# EAGLE board slice (EAGLE 5.11)
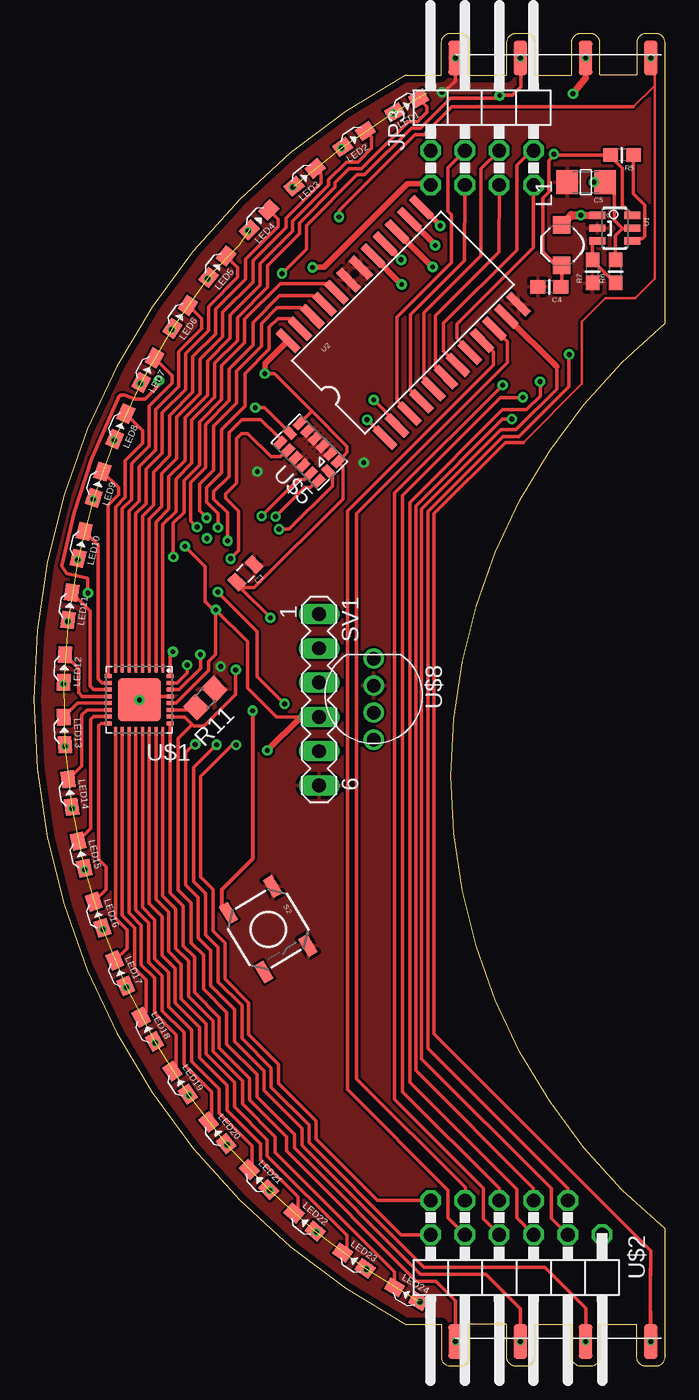
[diagram p0: board, top side]
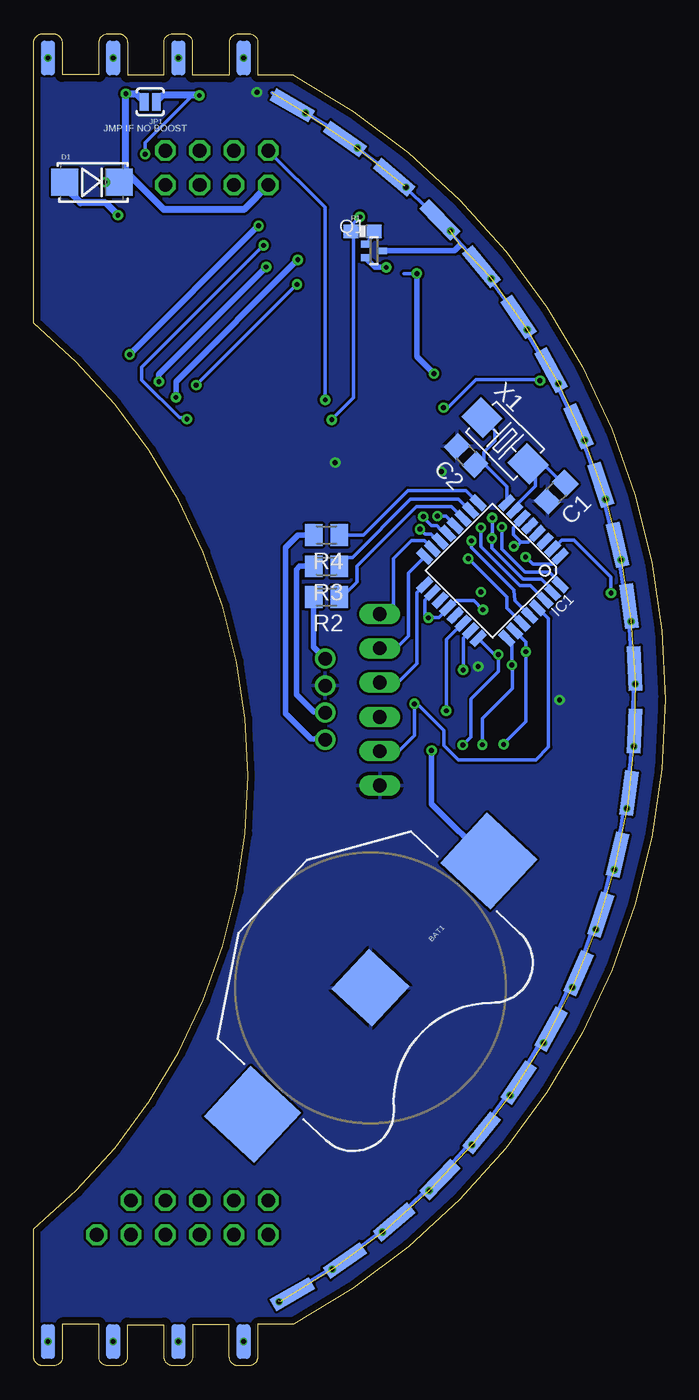
[diagram p1: board, bottom side, seen from below]

Size 46.74 x 98.58 mm. Coordinates in mm from the lower left corner, seen from the top.
Outline: 41.92,3.06 41.92,0.63 arc-90 41.28,0 40.45,0 arc-90 39.82,0.63 39.82,3.05 37.09,3.05 37.09,0.63 arc-90 36.45,0 35.63,0 arc-90 34.99,0.63 34.99,3.06 32.26,3.06 32.26,0.63 arc-90 31.63,0 30.8,0 arc-90 30.17,0.63 30.17,3.06 27.5,3.06 arc-123 27.5,95.52 30.16,95.52 30.16,97.94 arc-90 30.79,98.58 31.62,98.58 arc-90 32.25,97.94 32.25,95.5 35.01,95.5 35.01,97.94 arc-90 35.64,98.58 36.47,98.58 arc-90 37.1,97.94 37.1,95.5 39.81,95.5 39.81,97.94 arc-90 40.44,98.58 41.27,98.58 arc-90 41.9,97.94 41.9,95.53 44.65,95.53 44.65,97.94 arc-90 45.28,98.58 46.11,98.58 arc-90 46.74,97.94 46.74,77.15 arc101 46.74,10.12
Outline: 41.92,3.06 41.92,3.07
Outline: 41.92,3.06 44.62,3.06 44.62,0.63 arc90 45.26,0 46.11,0 arc90 46.74,0.63 46.74,10.12
Copper layers (1*16): Top 0.0356mm / dielectric 1.5011mm / Bottom 0.0356mm
Design rules "SilverCircuits-tented": minimum track width 7mil, minimum drill 14mil, track to track 7mil, track to pad 7mil, pad to pad 7mil, via to via 7mil, smd to smd 0mil, copper to edge 20mil, drill to drill 8mil, minimum pad ring 0mil, minimum via ring 8mil, stop-mask expansion 4mil, vias tented up to drill 14mil, thermal gap 10mil

## Footprints (pad centres in the part's own frame; a part is rotated, then mirrored left to right if it is on the bottom)
BATTCON_20MM = smd 5.08 x 5.08: 1 -12.827,0; 3 12.827,0 | smd 4.064 x 4.064: 2 0,0
C0805 = smd 1.3 x 1.5: 1 -0.95,0; 2 0.95,0
0805 = smd 0.8 x 1.2: 1 -0.9,0; 2 0.9,0
0603 = smd 1.1 x 1: 1 -0.85,0; 2 0.85,0
1206 = smd 1.6 x 1.8: 1 -1.4,0; 2 1.4,0
SMA-DIODE = smd 2 x 2: A -2,0; C 2,0
TQFP32-08 = smd 1.27 x 0.559: 1 -4.293,2.8; 2 -4.293,2; 3 -4.293,1.2; 4 -4.293,0.4; 5 -4.293,-0.4; 6 -4.293,-1.2; 7 -4.293,-2; 8 -4.293,-2.8; 17 4.293,-2.8; 18 4.293,-2; 19 4.293,-1.2; 20 4.293,-0.4; 21 4.293,0.4; 22 4.293,1.2; 23 4.293,2; 24 4.293,2.8 | smd 0.559 x 1.27: 9 -2.8,-4.293; 10 -2,-4.293; 11 -1.2,-4.293; 12 -0.4,-4.293; 13 0.4,-4.293; 14 1.2,-4.293; 15 2,-4.293; 16 2.8,-4.293; 25 2.8,4.293; 26 2,4.293; 27 1.2,4.293; 28 0.4,4.293; 29 -0.4,4.293; 30 -1.2,4.293; 31 -2,4.293; 32 -2.8,4.293
SJ_2S-NO = smd 0.635 x 1.27: 1 -0.45,0; 2 0.45,0
2X04/90 = drill 1.016 octagon: 1 -3.81,-6.35; 2 -3.81,-3.81; 3 -1.27,-6.35; 4 -1.27,-3.81; 5 1.27,-6.35; 6 1.27,-3.81; 7 3.81,-6.35; 8 3.81,-3.81
1_3X1_3 = smd 1.3 x 1.3: P$1 -1.5,0; P$2 1.5,0
LED_SIDE_LB192_HYBRID = smd 1.25 x 1: 1 -1.025,0; 2 1.025,0 | smd 3.3 x 1 bottom: 3 0,0 | drill 0.356 round: 4 -1.143,0
SOT416 = smd 0.6 x 0.5: 1 -0.65,0; 2 0.65,-0.5; 3 0.65,0.5
SPARKFUN_0603-RES = smd 1.1 x 1: 1 -0.85,0; 2 0.85,0
M0805 = smd 1.3 x 1.6: 1 -0.95,0; 2 0.95,0
R0805 = smd 1.3 x 1.5: 1 -0.95,0; 2 0.95,0
TACTILE_SWITCH_SMD = smd 1.524 x 0.762: 1 -2.54,1.905; 2 2.54,1.905; 3 -2.54,-1.905; 4 2.54,-1.905
MA06-1 = drill 1.016 long: 1 -6.35,0; 2 -3.81,0; 3 -1.27,0; 4 1.27,0; 5 3.81,0; 6 6.35,0
SOT23-6 = smd 0.55 x 1.2: 1 -0.95,-1.3; 2 0,-1.3; 3 0.95,-1.3; 4 0.95,1.3; 5 0,1.3; 6 -0.95,1.3
SO-24DW = smd 0.584 x 2.032: 1 -6.35,-5.08; 2 -5.08,-5.08; 3 -3.81,-5.08; 4 -2.54,-5.08; 5 -1.27,-5.08; 6 0,-5.08; 7 1.27,-5.08; 8 2.54,-5.08; 9 3.81,-5.08; 10 5.08,-5.08; 11 6.35,-5.08; 12 7.62,-5.08; 13 7.62,5.08; 14 6.35,5.08; 15 5.08,5.08; 16 3.81,5.08; 17 2.54,5.08; 18 1.27,5.08; 19 0,5.08; 20 -1.27,5.08; 21 -2.54,5.08; 22 -3.81,5.08; 23 -5.08,5.08; 24 -6.35,5.08
QFN32 = smd 0.3 x 0.6: 1 -1.75,-2.3; 2 -1.25,-2.3; 3 -0.75,-2.3; 4 -0.25,-2.3; 5 0.25,-2.3; 6 0.75,-2.3; 7 1.25,-2.3; 8 1.75,-2.3; 17 1.75,2.3; 18 1.25,2.3; 19 0.75,2.3; 20 0.25,2.3; 21 -0.25,2.3; 22 -0.75,2.3; 23 -1.25,2.3; 24 -1.75,2.3 | smd 0.6 x 0.3: 9 2.3,-1.75; 10 2.3,-1.25; 11 2.3,-0.75; 12 2.3,-0.25; 13 2.3,0.25; 14 2.3,0.75; 15 2.3,1.25; 16 2.3,1.75; 25 -2.3,1.75; 26 -2.3,1.25; 27 -2.3,0.75; 28 -2.3,0.25; 29 -2.3,-0.25; 30 -2.3,-0.75; 31 -2.3,-1.25; 32 -2.3,-1.75 | smd 3.2 x 3.2: EXP 0,0
2X6_MINUS1 = drill 1.016 octagon: 2 6.35,2.54; 3 3.81,5.08; 4 3.81,2.54; 5 1.27,5.08; 6 1.27,2.54; 7 -1.27,5.08; 8 -1.27,2.54; 9 -3.81,5.08; 10 -3.81,2.54; 11 -6.35,5.08; 12 -6.35,2.54
SLICE_EDGE = smd 1 x 2.54: P$1 -9.652,0; P$2 -4.826,0; P$3 0,0; P$4 -14.478,0 | smd 1 x 2.54 bottom: P$5 -14.478,0; P$6 -9.652,0; P$7 -4.826,0; P$8 0,0 | drill 0.356 round: P$9 -14.478,0; P$11 -9.652,0; P$12 -4.826,0; P$13 0,0
LGA-14 = smd 0.6 x 0.9: 1 -2,-1; 2 -1.2,-1; 3 -0.4,-1; 4 0.4,-1; 5 1.2,-1; 6 2,-1; 8 2,1; 9 1.2,1; 10 0.4,1; 11 -0.4,1; 12 -1.2,1; 13 -2,1 | smd 0.9 x 0.6: 7 2,0; 14 -2,0
LED-TRICOLOR-THROUGHHOLE = drill 1 round: BLU 1,0; GND -1,0; GRN 3,0; RED -3,0
5032 = smd 2.286 x 2.032: 1 -2.413,0; 2 2.413,0

## Placement (x,y rotation side)
BAT1  [BATTCON_20MM]  21.81,27.97 227 bottom
C1  [C0805]  8.05,64.65 225 bottom
C2  [C0805]  14.73,67.37 135 bottom
C3  [0805]  15.67,58.65 225 top
C4  10uF  [0603]  38.17,79.84 180 top
C5  22uF  [1206]  40.89,87.59 180 top
D1  MBRA210LT3G  [SMA-DIODE]  42.44,87.59 0 bottom
IC1  MEGA8-AI  [TQFP32-08]  12.77,58.84 225 bottom
JP1  [SJ_2S-NO]  38.12,93.54 180 bottom
JP3  [2X04/90]  33.19,93.74 0 top
L1  2.2uH  [1_3X1_3]  39.08,82.94 90 top
LED1  SIDE_LED_LBV193HYBRID  [LED_SIDE_LB192_HYBRID]  27.6,93.28 30 top
LED2  SIDE_LED_LBV193HYBRID  [LED_SIDE_LB192_HYBRID]  23.71,90.79 35.2 top
LED3  SIDE_LED_LBV193HYBRID  [LED_SIDE_LB192_HYBRID]  20.05,87.96 40.4 top
LED4  SIDE_LED_LBV193HYBRID  [LED_SIDE_LB192_HYBRID]  16.68,84.8 45.7 top
LED5  SIDE_LED_LBV193HYBRID  [LED_SIDE_LB192_HYBRID]  13.6,81.35 50.9 top
LED6  SIDE_LED_LBV193HYBRID  [LED_SIDE_LB192_HYBRID]  10.84,77.63 56.1 top
LED7  SIDE_LED_LBV193HYBRID  [LED_SIDE_LB192_HYBRID]  8.44,73.68 61.3 top
LED8  SIDE_LED_LBV193HYBRID  [LED_SIDE_LB192_HYBRID]  6.41,69.53 66.5 top
LED9  SIDE_LED_LBV193HYBRID  [LED_SIDE_LB192_HYBRID]  4.76,65.21 71.7 top
LED10  SIDE_LED_LBV193HYBRID  [LED_SIDE_LB192_HYBRID]  3.51,60.76 77 top
LED11  SIDE_LED_LBV193HYBRID  [LED_SIDE_LB192_HYBRID]  2.68,56.21 82.2 top
LED12  SIDE_LED_LBV193HYBRID  [LED_SIDE_LB192_HYBRID]  2.25,51.6 87.4 top
LED13  SIDE_LED_LBV193HYBRID  [LED_SIDE_LB192_HYBRID]  2.25,46.98 92.6 top
LED14  SIDE_LED_LBV193HYBRID  [LED_SIDE_LB192_HYBRID]  2.67,42.38 97.8 top
LED15  SIDE_LED_LBV193HYBRID  [LED_SIDE_LB192_HYBRID]  3.51,37.83 103 top
LED16  SIDE_LED_LBV193HYBRID  [LED_SIDE_LB192_HYBRID]  4.76,33.38 108.3 top
LED17  SIDE_LED_LBV193HYBRID  [LED_SIDE_LB192_HYBRID]  6.41,29.05 113.5 top
LED18  SIDE_LED_LBV193HYBRID  [LED_SIDE_LB192_HYBRID]  8.44,24.9 118.7 top
LED19  SIDE_LED_LBV193HYBRID  [LED_SIDE_LB192_HYBRID]  10.84,20.95 123.9 top
LED20  SIDE_LED_LBV193HYBRID  [LED_SIDE_LB192_HYBRID]  13.59,17.23 129.1 top
LED21  SIDE_LED_LBV193HYBRID  [LED_SIDE_LB192_HYBRID]  16.67,13.78 134.3 top
LED22  SIDE_LED_LBV193HYBRID  [LED_SIDE_LB192_HYBRID]  20.05,10.63 139.6 top
LED23  SIDE_LED_LBV193HYBRID  [LED_SIDE_LB192_HYBRID]  23.7,7.79 144.8 top
LED24  SIDE_LED_LBV193HYBRID  [LED_SIDE_LB192_HYBRID]  27.6,5.3 150 top
Q1  BC857AT115  [SOT416]  21.56,82.51 180 bottom
R1  620  [SPARKFUN_0603-RES]  22.4,83.96 0 bottom
R2  [M0805]  25.06,56.89 180 bottom
R3  [M0805]  25.06,59.17 180 bottom
R4  [M0805]  25.06,61.48 180 bottom
R5  1M  [0603]  43.55,89.6 180 top
R6  95.3K  [0603]  43.07,80.99 90 top
R7  30.9K  [0603]  41.37,80.99 90 top
R11  [R0805]  12.71,49.41 225 top
S2  [TACTILE_SWITCH_SMD]  17.36,32.3 301 top
SV1  [MA06-1]  21.12,49.29 270 top
U1  LTC3426  [SOT23-6]  43.02,84.19 270 top
U2  CD74HC154M  [SO-24DW]  26.91,76.76 45 top
U$1  TLC5947  [QFN32]  7.81,49.29 180 top
U$2  2X6_MINUS1  [2X6_MINUS1]  35.73,7.15 0 top
U$4  EDGE_SLICE  [SLICE_EDGE]  45.69,1.79 0 top
U$5  MMA7455L  [LGA-14]  20.39,67.62 135 top
U$8  LED-TRICOLOR-THROUGHHOLE  [LED-TRICOLOR-THROUGHHOLE]  25.16,49.34 270 top
U$9  EDGE_SLICE  [SLICE_EDGE]  45.69,96.79 0 top
X1  [5032]  11.86,68.46 315 bottom

## Library data of the parts
BAT1 C3 JP1 S2 U2 U$8 = SparkFun
C1 C2 R11 = rcl
C4 C5 L1 R5-R7 = CH_passive
D1 = CH_semiconductors
IC1 = atmel; MPN: ATMEGA8-16AU; OC_FARNELL: 9171371; OC_NEWARK: 73M8863
JP3 = pinhead
LED1-LED24 R2-R4 U$2 U$4 U$9 = slice
Q1 = zetex
R1 = Nullspace
SV1 = NSL
U1 = CH_Linear_technology
U$1 = lil_rgb
U$5 = MMA7455Lbreakoutboard-v1a
X1 = NSL_MiniQuad

## Nets
5V+: C5.1 D1.C JP1.2 JP3.1 Q1.3 R6.2 U1.5 U$9.P$2
!CS: IC1.2 U$5.7
A0: IC1.30 U2.23
A1: IC1.31 U2.22
A2: IC1.32 U2.21
A3: IC1.1 U2.20
BLANK: IC1.24 U$1.30 U$2.11
BLUE: IC1.10 R3.1
BUTTON: IC1.22 S2.3
COL1: LED1.2 U$1.1
COL2: LED2.2 U$1.2
COL3: LED3.2 U$1.3
COL4: LED4.2 U$1.4
COL5: LED5.2 U$1.5
COL6: LED6.2 U$1.6
COL7: LED7.2 U$1.7
COL8: LED8.2 U$1.8
COL9: LED9.2 U$1.9
COL10: LED10.2 U$1.10
COL11: LED11.2 U$1.11
COL12: LED12.2 U$1.12
COL13: LED13.2 U$1.13
COL14: LED14.2 U$1.14
COL15: LED15.2 U$1.15
COL16: LED16.2 U$1.16
COL17: LED17.2 U$1.17
COL18: LED18.2 U$1.18
COL19: LED19.2 U$1.19
COL20: LED20.2 U$1.20
COL21: LED21.2 U$1.21
COL22: LED22.2 U$1.22
COL23: LED23.2 U$1.23
COL24: LED24.2 U$1.24
GND: BAT1.2 C1.2 C2.2 C3.1 C4.2 C5.2 IC1.3 IC1.5 IC1.21 R7.1 R11.1 S2.1 S2.2 SV1.6 U1.2 U2.12 U2.18 U2.19 U$1.29 U$5.2 U$5.3 U$5.4 U$5.5 U$5.10 U$5.11 U$8.GND U$9.P$4
GREEN: IC1.9 R4.1
INT1/DRDY: IC1.28 U$5.8
INT2: IC1.27 U$5.9
LINE1: LED1.1 LED2.1 LED3.1 LED4.1 LED5.1 LED6.1 LED7.1 LED8.1 LED9.1 LED10.1 LED11.1 LED12.1 LED13.1 LED14.1 LED15.1 LED16.1 LED17.1 LED18.1 LED19.1 LED20.1 LED21.1 LED22.1 LED23.1 LED24.1 Q1.1
MISO: IC1.16 SV1.2
MOSI: IC1.15 SV1.1
N$1: R5.1 U1.4
N$2: Q1.2 R1.2
N$3: R2.2 U$8.RED
N$4: R3.2 U$8.BLU
N$6: R4.2 U$8.GRN
N$7: C1.1 IC1.7 X1.2
N$8: C2.1 IC1.8 X1.1
N$13: R11.2 U$1.27
N$22: D1.A L1.P$2 U1.1
N$28: R6.1 R7.2 U1.3
RED: IC1.11 R2.1
ROW1: R1.1 U2.1 U$4.P$3 U$9.P$3
ROW2: JP3.2 U2.2
ROW3: JP3.4 U2.3
ROW4: JP3.3 U2.4
ROW5: JP3.6 U2.5
ROW6: JP3.5 U2.6
ROW7: JP3.8 U2.7
ROW8: JP3.7 U2.8
ROW9: U2.9 U$2.10
ROW10: U2.10 U$2.9
ROW11: U2.11 U$2.4
ROW13: U2.13 U$2.3
ROW14: U2.14 U$2.5
ROW15: U2.15 U$2.6
ROW16: U2.16 U$2.7
ROW17: U2.17 U$2.8
RST: IC1.29 SV1.5
SCK: IC1.17 SV1.3
SCL/SPC: IC1.13 U$5.13
SCLK: IC1.25 U$1.31 U$2.12
SDA/SDI/SDO: IC1.12 U$5.12
SDO: IC1.14 U$5.14
SIN: IC1.26 U$1.32 U$4.P$2
SOUT: U$1.25 U$4.P$4
VCC: BAT1.1 C3.2 C4.1 IC1.4 IC1.6 IC1.18 IC1.20 JP1.1 L1.P$1 R5.2 SV1.4 U1.6 U2.24 U$1.28 U$5.1 U$5.6 U$9.P$1
XLAT: IC1.23 U$1.26 U$4.P$1

## Tracks (layer width: path | path; a pad name or v marks a point on that pad's centre or on a via)
5V+  (via drill 0.36)
  Top 0.254: 43.6,84.14 43.58,84.14 43.07,83.63 R6.2 | U1.5 44.27,84.14 43.6,84.14 | 43.6,84.14 42.97,84.77 42.97,86.7 42.29,87.39 C5.1 | 40.86,95.31 U$9.P$2
  Top 0.406: JP3.1 29.25,87.49 27.68,87.49 21.48,81.29 v20.64,81.29
  Top 0.508: v39.92,94.14 40.86,95.31 | v41.47,87.59 C5.1
  Bottom 0.254: 39.92,88.11 D1.C
  Bottom 0.406: v20.64,81.29 21.49,81.29 Q1.3
  Bottom 0.508: D1.C v41.47,87.59 | JP3.1 31.18,85.56 37.1,85.56 39.65,88.11 39.92,88.11 v39.92,94.14 39.18,94.14 JP1.2
!CS  (via drill 0.36)
  Top 0.254: v4.01,57.19 4.01,58.25 3.96,58.31 2.46,58.64 2.08,59.17 2.99,63.13 4.29,67.14 6.27,71.62 arc-90 6.47,71.82 6.72,71.82 7.51,71.54 | v9.26,72.91 9.26,72.55 8.25,71.54 7.51,71.54 | 7.51,71.54 7.51,71.56 | v16.4,70.9 17.1,70.9 U$5.7
  Bottom 0.254: IC1.2 8.27,60.47 7.64,61.1 6.75,61.1 4.01,58.36 v4.01,57.19 | v9.26,72.91 9.34,72.99 14.01,72.99 16.1,70.9 v16.4,70.9
A0  (via drill 0.36)
  Top 0.254: v13.63,62.04 13.63,63.08 12.79,63.92 12.79,64.99 13.91,66.1 13.91,69.28 15.64,71.01 15.64,73.44 17.42,75.22 17.42,76.85 18.08,77.51 18.98,77.51 U2.23
  Bottom 0.254: IC1.30 9.98,57.75 10.76,57.75 13.63,60.62 v13.63,62.04
A1  (via drill 0.36)
  Top 0.254: v12.79,62.75 12.26,63.28 12.26,65.24 13.3,66.28 13.3,69.53 15.03,71.26 15.03,73.62 16.86,75.45 16.86,77.13 18.03,78.3 19.75,78.3 20.39,77.66 U2.22
  Bottom 0.254: IC1.31 8.33,57.39 9.16,58.23 10.53,58.23 12.82,60.52 v12.82,61.23 12.79,61.25 v12.79,62.75
A2  (via drill 0.36)
  Top 0.254: v12.08,62.06 11.63,62.52 11.63,65.37 12.72,66.46 12.72,69.66 14.47,71.41 14.47,73.77 16.22,75.53 16.22,77.2 18.2,79.18 20.69,79.18 21.32,78.56 U2.21
  Bottom 0.254: IC1.32 7.76,57.92 8.58,58.74 10.38,58.74 12.08,60.44 v12.08,62.06
A3  (via drill 0.36)
  Top 0.254: v10.33,59.85 10.33,62.37 11.12,63.16 11.12,65.52 12.26,66.66 12.26,69.84 13.91,71.49 13.91,74 15.61,75.7 15.61,77.46 18.26,80.1 21.76,80.1 22.4,79.46 U2.20
  Bottom 0.254: IC1.1 8.34,59.32 9.8,59.32 v10.33,59.85
BLANK  (via drill 0.36)
  Top 0.254: U$1.30 10.78,50.04 12.34,51.6 v12.34,52.64 | v14.98,45.94 14.7,45.94 12.36,43.6 12.36,36.16 13.28,35.24 13.28,32.17 14.17,31.28 14.17,28.61 15.92,26.86 15.92,24.52 18.13,22.31 18.13,20.89 20.9,18.12 20.9,16.78 25.44,12.23 U$2.11
  Bottom 0.254: IC1.24 12.64,52.64 v12.34,52.64 12.34,51.37 14.37,49.34 14.37,46.55 v14.98,45.94
BLUE
  Bottom 0.254: IC1.10 14.46,63.29 15.31,64.15 18.84,64.15 23.16,59.83 23.89,59.83 24.11,59.61 R3.1
BUTTON  (via drill 0.36)
  Top 0.305: v16.2,48.48 16.2,37.49 13.92,35.22 13.92,33.99 S2.3
  Bottom 0.254: IC1.22 15.63,54.29 15.64,54.29 16.2,53.73 v16.2,48.48
COL1
  Top 0.254: U$1.1 9.56,62.26 10.53,63.23 10.53,65.62 11.7,66.79 11.7,69.99 13.4,71.69 13.4,74.21 15.08,75.88 15.08,77.58 17.32,79.82 17.32,81.42 19.68,83.78 19.68,84.57 22.32,87.21 22.32,87.57 23.34,88.58 24.28,88.58 27.75,92.06 28.39,92.06 29.1,92.77 29.1,93.18 LED1.2
COL2
  Top 0.254: U$1.2 9.06,62.44 10,63.39 10,65.8 11.19,66.99 11.19,70.17 12.87,71.84 12.87,74.36 14.55,76.03 14.55,77.76 16.76,79.97 16.76,81.57 19.17,83.98 19.17,84.72 21.84,87.39 21.84,87.77 23.16,89.09 24,89.09 25.01,90.11 25.01,90.91 LED2.2
COL3
  Top 0.254: U$1.3 8.56,62.68 9.47,63.59 9.47,66.03 10.58,67.14 10.58,70.22 12.31,71.95 12.31,74.49 13.99,76.16 13.99,77.97 16.22,80.2 16.22,81.78 18.66,84.21 18.66,84.92 21.25,87.52 21.25,88.2 LED3.2
COL4
  Top 0.254: U$1.4 8.06,62.89 8.86,63.69 8.86,66.15 10.05,67.35 10.05,70.32 11.78,72.05 11.78,74.69 13.45,76.36 13.45,78.19 15.66,80.4 15.66,81.9 18.08,84.32 18.08,84.85 LED4.2
COL5
  Top 0.254: U$1.5 7.56,63.05 8.32,63.82 8.32,66.36 9.52,67.55 9.52,70.52 11.24,72.25 11.24,74.89 12.95,76.59 12.95,78.4 15.11,80.56 15.11,81.28 LED5.2
COL6
  Top 0.254: U$1.6 7.06,63.24 7.82,64 7.82,66.56 9.04,67.78 9.04,70.78 10.74,72.48 10.74,75.07 12.41,76.75 12.41,77.49 LED6.2
COL7
  Top 0.254: U$1.7 6.56,63.42 7.26,64.12 7.26,66.76 8.55,68.06 8.55,71.03 10.23,72.71 10.23,73.29 LED7.2
COL8
  Top 0.254: U$1.8 6.06,63.56 6.77,64.27 6.77,66.99 8.07,68.29 8.07,69.22 LED8.2
COL9
  Top 0.254: U$1.9 5.51,63.69 6.29,64.48 6.29,64.97 LED9.2
COL10
  Top 0.254: U$1.10 5.07,50.54 4.77,50.84 4.77,60.73 LED10.2
COL11
  Top 0.254: U$1.11 4.45,50.04 4.18,50.3 4.18,55.86 LED11.2
COL12
  Top 0.254: U$1.12 3.6,49.54 3.32,49.82 3.32,51.61 LED12.2
COL13
  Top 0.254: U$1.13 3.24,49.04 LED13.2
COL14
  Top 0.254: U$1.14 3.94,48.54 3.55,48.15 3.55,44.4 LED14.2
COL15
  Top 0.254: U$1.15 5.23,48.04 4.44,48.04 4.21,47.82 4.21,39.75 LED15.2
COL16
  Top 0.254: U$1.16 4.97,47.54 4.82,47.38 4.82,37.45 5.35,36.92 5.35,35.26 LED16.2
COL17
  Top 0.254: U$1.17 6.06,33.09 6.9,32.25 6.9,30.9 LED17.2
COL18
  Top 0.254: U$1.18 6.56,33.33 7.49,32.4 7.49,29.4 8.32,28.56 8.32,26.18 LED18.2
COL19
  Top 0.254: U$1.19 7.06,33.51 7.97,32.6 7.97,29.65 8.93,28.69 8.93,26.1 10.53,24.5 10.53,22.07 LED19.2
COL20
  Top 0.254: U$1.20 7.56,33.72 8.5,32.78 8.5,29.86 9.52,28.84 9.52,26.28 11.12,24.68 11.12,22.29 13.15,20.26 13.15,18.23 LED20.2
COL21
  Top 0.254: U$1.21 8.06,33.91 8.96,33.01 8.96,30.11 9.97,29.1 9.97,26.56 11.68,24.85 11.68,22.52 13.71,20.48 13.71,18.71 16.15,16.27 16.15,14.71 LED21.2
COL22
  Top 0.254: U$1.22 8.56,34.2 9.52,33.24 9.52,30.37 10.48,29.4 10.48,26.83 12.26,25.06 12.26,22.8 14.32,20.74 14.32,18.91 16.81,16.42 16.81,15.23 19.55,12.48 19.55,11.57 LED22.2
COL23
  Top 0.254: U$1.23 9.06,34.51 9.97,33.59 9.97,30.64 10.91,29.71 10.91,27.14 12.74,25.31 12.74,23.08 14.85,20.97 14.85,19.16 17.29,16.73 17.29,15.53 23.18,9.64 23.18,8.7 LED23.2
COL24
  Top 0.254: U$1.24 9.56,34.77 10.51,33.82 10.51,30.9 11.45,29.96 11.45,27.34 13.28,25.51 13.28,23.28 15.46,21.09 15.46,19.37 17.87,16.95 17.87,15.79 26.71,6.95 LED24.2
GND  (via drill 0.36)
  Top 0.254: U$1.29 8.09,49.54 v7.82,49.26 | 30.08,94.16 30.83,94.68 31.21,95.06 U$9.P$4
  other vias: 13.84,51.75 30.22,94.25 16.55,66.18 24.43,66.84
  pour Bottom: 44.87,110.99 53,111.52 53,-13.02 -2.92,17.32 -2.1,81.71
  pour Top: 54.3,-0.92 arc-120 42.83,-7.49 2.67,16.03 arc-59 -1.1,22.5 -1.84,76.62 arc-61 2.04,83.36 42.94,106.39 arc-119 54.3,99.75
GREEN
  Bottom 0.254: IC1.9 14.75,64.78 19.04,64.78 22.34,61.48 R4.1
INT1/DRDY  (via drill 0.36)
  Top 0.254: U$5.8 18.27,68.61 18.03,68.85 18,68.85 16.81,70.04 15.44,70.04 14.45,69.05 14.45,65.8 13.33,64.68 13.33,64.15 14.34,63.13 v14.34,61.05
  Bottom 0.254: IC1.28 11.12,56.62 11.19,57.42 14.34,60.57 v14.34,61.05
INT2  (via drill 0.36)
  Top 0.254: v14.57,59.73 15.16,60.31 15.16,63.26 14.19,64.22 14.19,64.53 15,65.34 15,68.62 15.39,69 15.84,69 17.57,67.27 18.28,67.27 18.77,67.76 U$5.9
  Bottom 0.254: v14.57,59.73 11.73,56.88 11.73,56.07 10.62,54.96 IC1.27
LINE1  (25 unrouted)
  Bottom 0.254: 29.1,94.22 arc123 28.62,4.79
  Bottom 0.406: Q1.1 15.61,82.51 15.21,82.92
MISO
  Bottom 0.254: IC1.16 19.02,58.67 19.02,54.01 19.93,53.1 SV1.2
MOSI
  Bottom 0.254: IC1.15 17.83,61.07 18.76,61.07 20.11,59.73 20.11,55.69 20.16,55.64 SV1.1
N$1
  Top 0.254: U1.4 44.48,83.4 45.05,83.4 45.26,83.6 45.26,85.89 44.4,86.74 R5.1
N$2
  Bottom 0.254: Q1.2 21.55,83.67 R1.2
N$3
  Bottom 0.406: R2.2 26.01,53.19 U$8.RED
N$4
  Bottom 0.406: R3.2 27.07,59.17 27.3,58.94 27.3,49.67 26,48.37 25.2,48.37 U$8.BLU
N$6
  Bottom 0.406: R4.2 27.17,61.48 28.11,60.54 28.11,48.27 26.21,46.37 25.19,46.37 U$8.GRN
N$7
  Bottom 0.254: IC1.7 11.15,63.55 9.62,65.09 9.62,66.23 X1.2 9.05,66.76 7.62,65.32 C1.1
N$8
  Bottom 0.254: IC1.8 11.72,65.08 13.4,66.76 | 13.4,66.76 13.99,66.76 C2.1 | 13.4,66.76 13.4,67.6 12.59,68.41 12.59,69.2 X1.1
N$13
  Top 0.254: U$1.27 11.84,48.54 R11.2
N$22  (via drill 0.36)
  Top 0.406: 41.7,85.15 U1.1
  Top 0.508: v40.51,85.15 41.7,85.15
  Top 0.61: L1.P$2 39.79,85.15 v40.51,85.15
  Bottom 0.406: 44.44,87.23 D1.A
  Bottom 0.508: v40.51,85.15 41.42,86.07 43.27,86.07 44.44,87.23
N$28
  Top 0.254: U1.3 41.65,83.17 41.37,83.17 R7.2 R6.1
RED
  Bottom 0.254: IC1.11 15.82,63.59 18.41,63.59 22.8,59.19 22.8,58 23.91,56.89 R2.1
ROW1  (via drill 0.36)
  Top 0.203: 36.24,68.34 40.58,72.68 40.58,77.27 42.3,79 44.54,79 45.99,80.45 45.99,94.71 | 45.99,94.71 45.99,96.79 U$9.P$3 | 44.39,93.18 45.93,94.71 45.99,94.71
  Top 0.254: v22.6,85.03 22.65,85.08 22.65,85.53 28.24,91.12 28.9,91.12 30.96,93.18 44.39,93.18 | U2.1 v24.68,70.01 | U$4.P$3 45.69,3.99 45.7,4 | U$4.P$3 45.61,2.88 | 36.24,68.34 34.92,68.34 29.63,63.06 29.63,24.57 45.69,8.52 45.69,6.72 45.66,6.69 | 45.66,6.69 45.66,7.2 | 45.66,6.69 45.66,2.43 45.79,2.3 45.79,2.7 U$4.P$3
  Bottom 0.254: 22.6,84.99 v22.6,85.03 23.25,84.38 R1.1 23.06,83.77 23.06,71.64 v24.68,70.01
ROW2  (via drill 0.36)
  Top 0.254: U2.2 26.91,69.74 v25.16,71.49
  Bottom 0.254: v25.16,71.49 25.16,85.74 JP3.2
ROW3
  Top 0.254: U2.3 27.81,70.52 26.89,71.44 26.89,77.61 30.9,81.62 30.9,85.2 30.65,85.46 30.65,88.68 JP3.4
ROW4
  Top 0.254: U2.4 27.91,72.17 27.88,72.17 27.88,77.79 31.9,81.8 JP3.3
ROW5
  Top 0.254: U2.5 28.87,73 28.87,77.94 33.09,82.16 33.09,88.58 JP3.6
ROW6
  Top 0.254: U2.6 29.74,73.94 29.74,77.71 34.44,82.41 JP3.5
ROW7
  Top 0.254: U2.7 31.37,74.07 30.35,75.09 30.35,77.15 35.76,82.56 35.76,88.84 36.85,89.93 JP3.8
ROW8
  Top 0.254: U2.8 32.3,75.07 31.34,76.03 31.34,77.08 37,82.74 JP3.7
ROW9
  Top 0.254: U2.9 34.02,75.04 34.02,74.07 23.22,63.27 23.22,20.45 30.68,12.99 30.68,10.93 U$2.10
ROW10
  Top 0.254: U2.10 34.11,76.76 35.08,75.79 35.08,74.26 23.89,63.07 23.89,21.25 31.95,13.2 31.95,12.26 U$2.9
ROW11
  Top 0.254: 38.73,73.93 38.73,72.29 35.71,69.27 34.6,69.27 28.72,63.41 28.72,22.72 38.32,13.12 38.32,10.91 U$2.4
  Top 0.406: U2.11 38.73,73.93
ROW13  (via drill 0.36)
  Top 0.254: v39.64,74.84 39.63,74.83 39.63,72.47 35.93,68.77 34.73,68.77 29.19,63.23 29.19,23.49 39.54,13.14 U$2.3
  Top 0.406: U2.13 28.71,85.74 v30.09,84.37
  Bottom 0.406: v30.09,84.37 30.12,84.37 v39.64,74.84
ROW14  (via drill 0.36)
  Top 0.254: v35.4,70.05 34.7,70.05 28.29,63.64 28.29,21.86 37,13.14 U$2.5
  Top 0.406: U2.14 27.81,84.84 v29.72,82.92
  Bottom 0.254: v29.72,82.92 38.74,73.9 38.74,72.96 35.93,70.15 35.41,70.15 v35.4,70.05
ROW15  (via drill 0.36)
  Top 0.254: v37.48,72.83 37.5,72.82 37.5,71.77 36.47,70.75 34.71,70.75 27.84,63.88 27.84,20.95 35.76,13.04 35.76,10.93 U$2.6
  Top 0.406: U2.15 v29.53,81.32
  Bottom 0.406: v29.53,81.32 37.48,73.37 v37.48,72.83
ROW16  (via drill 0.36)
  Top 0.254: v36.21,71.67 34.56,71.67 27.3,64.4 27.3,20.28 34.46,13.12 U$2.7
  Top 0.406: U2.16 27.2,81.86 v27.2,81.85
  Bottom 0.406: v27.2,81.85 36.21,72.83 v36.21,71.67
ROW17  (via drill 0.36)
  Top 0.254: v34.71,72.58 26.71,64.58 26.71,19.7 33.29,13.12 33.29,10.86 U$2.8
  Top 0.406: U2.17 v27.24,80.02 v27.25,80.02
  Bottom 0.254: v27.25,80.02 27.27,80.02 v34.71,72.58
RST  (via drill 0.36)
  Top 0.254: v18.56,48.98 16.53,51.02 16.53,54.34 13.71,57.16 13.71,57.19 v13.63,57.26
  Bottom 0.254: 9.46,56.11 IC1.29 9.64,56.09 9.64,56.32 8.63,55.31 8.63,45.78 9.57,44.84 15.31,44.84 16.38,45.91 16.38,47.03 18.33,48.98 v18.56,48.98 18.56,46.65 19.75,45.45 21.1,45.45 SV1.5
SCK
  Bottom 0.254: IC1.17 18.36,57.22 18.36,51.98 19.78,50.56 SV1.3
SCL/SPC  (via drill 0.36)
  Top 0.254: U$5.13 20.97,65.5 20.47,64.99 20.03,64.99 v17.9,62.85
  Bottom 0.254: IC1.13 16.43,61.94 16.66,61.94 16.88,62.17 17.29,62.17 17.8,62.67 v17.9,62.85
SCLK  (via drill 0.36)
  Top 0.254: U$1.31 10.62,50.54 11.35,51.27 v11.35,51.85 | v13.53,45.96 11.83,44.26 11.83,35.85 12.72,34.96 12.72,31.89 13.66,30.95 13.66,28.41 15.41,26.66 15.41,24.22 17.57,22.06 17.57,20.61 20.36,17.82 20.36,16.52 27.2,9.69 U$2.12
  Bottom 0.254: IC1.25 11.35,53.46 v11.35,51.85 11.3,51.8 11.3,50.13 13.53,47.89 v13.53,45.96
SDA/SDI/SDO  (via drill 0.36)
  Top 0.254: v16.86,62.88 19.58,65.6 20.06,65.6 U$5.12
  Bottom 0.254: IC1.12 16.24,62.88 v16.86,62.88
SDO  (via drill 0.36)
  Top 0.254: v18.15,61.91 18.92,61.91 22.12,65.11 22.12,65.89 U$5.14
  Bottom 0.254: IC1.14 16.82,61.03 17.34,61.56 17.8,61.56 v18.15,61.91
SIN  (via drill 0.36)
  Top 0.254: U$1.32 10.11,52.65 v10.31,52.84 | v11.96,45.99 11.83,45.99 11.24,45.4 11.24,35.57 12.16,34.66 12.16,31.66 13.1,30.72 13.1,28.16 14.88,26.38 14.88,23.99 17.04,21.83 17.04,20.38 19.86,17.56 19.86,16.32 28.9,7.28 37.84,7.28 40.86,4.25 U$4.P$2
  Bottom 0.254: IC1.26 10.31,53.55 v10.31,52.84 10.31,47.66 11.96,46.01 v11.96,45.99
SOUT
  Top 0.254: U$1.25 10.11,34.98 11.07,34.02 11.07,31.08 11.91,30.24 11.91,27.62 13.73,25.79 13.73,23.51 15.97,21.27 15.97,19.67 18.71,16.93 18.71,15.89 28.34,6.26 29.76,6.26 31.21,4.81 U$4.P$4
VCC  (via drill 0.36)
  Top 0.254: U$1.28 10.54,49.04 12.95,51.45 12.95,52.13 13.45,52.64 13.45,55.92 v13.48,55.94 | v18.38,80.84 20.19,82.64 20.19,84.39 23.94,88.15 24.5,88.15 27.96,91.6 28.64,91.6 30.85,93.81 34.28,93.81 v34.49,94.02 35.43,94.02 36.06,94.65 36.06,95.75 U$9.P$1 | v13.48,55.94 15.84,53.58 15.84,50.15 17.98,48.02 SV1.4 | v11.19,60.64 12.69,59.14 12.69,56.55 13.3,55.94 v13.48,55.94 | 15.36,57.52 15.04,57.84 C3.2 | 15.36,57.52 v17.52,55.36 | 15.36,57.52 15.44,57.59 16.32,57.59 22.88,64.15 22.88,66.51 22.51,66.88 U$5.1 23.05,67.45 23.06,67.45 23.21,67.6 23.21,68.03 20.53,70.71 | 20.53,70.71 17.82,73.42 v17.11,73.42 | U$5.6 20.53,70.58 20.53,70.71 | C4.1 39.08,79.91 L1.P$1 38.68,81.44 37.69,82.44 37.69,86.42 38.12,86.86 38.12,89.19 38.5,89.57 v38.5,89.67 38.58,89.6 R5.2 42.7,89.51 43.58,88.63 43.58,85.88 U1.6
  Top 0.406: 20.26,48.02 SV1.4 19.78,48.02 v17.29,45.53 | v17.11,73.42 17.11,74.15 U2.24
  Bottom 0.254: 13.4,56.02 v13.48,55.94 14.17,56.63 15.46,56.63 15.68,56.41 | v17.11,73.42 16.92,73.61 | v18.38,80.84 19.34,80.84 | IC1.4 10.11,60.95 10.69,60.95 | 10.69,60.95 11.24,61.51 11.24,62.01 10.59,62.67 IC1.6 | 10.69,60.95 10.99,60.64 v11.19,60.64 | 15.68,56.41 16.73,55.36 v17.52,55.36 17.8,55.36 17.8,56.65 17.79,56.65 IC1.18 | IC1.20 arc90 15.77,56.41 15.68,56.41 | v38.5,89.67 38.5,90.51 34.99,94.02 v34.49,94.02
  Bottom 0.406: BAT1.1 17.29,41.58 v17.29,45.53 | v17.11,73.42 18.38,74.69 v18.38,80.84
  Bottom 0.508: JP1.1 37.19,94.02 v34.49,94.02
XLAT  (via drill 0.36)
  Top 0.254: U$1.26 10.13,48.02 11.17,48.02 11.73,47.46 | 11.73,47.46 11.85,47.33 12.62,47.33 14.95,49.67 v14.95,51.5 | 11.73,47.46 10.69,46.42 10.69,35.22 11.65,34.25 11.65,31.31 12.57,30.39 12.57,27.88 14.29,26.15 14.29,23.79 16.53,21.55 16.53,19.9 19.3,17.13 19.3,16.12 28.64,6.77 33.48,6.77 36.04,4.22 U$4.P$1
  Bottom 0.254: 14.4,54.32 IC1.23 14.93,53.86 14.93,51.42 v14.95,51.5

## Text on the board
bPlace: JMP IF NO BOOST